# Altium PCB atxmega.PcbDoc
Units mm, origin at the board's own origin, x right, y up, seen from the top; angles counter-clockwise.
Board outline 50 x 40 mm, 2 copper layers (Top Layer, Bottom Layer); 40 components, 48 nets, 226 pads, 47 vias.
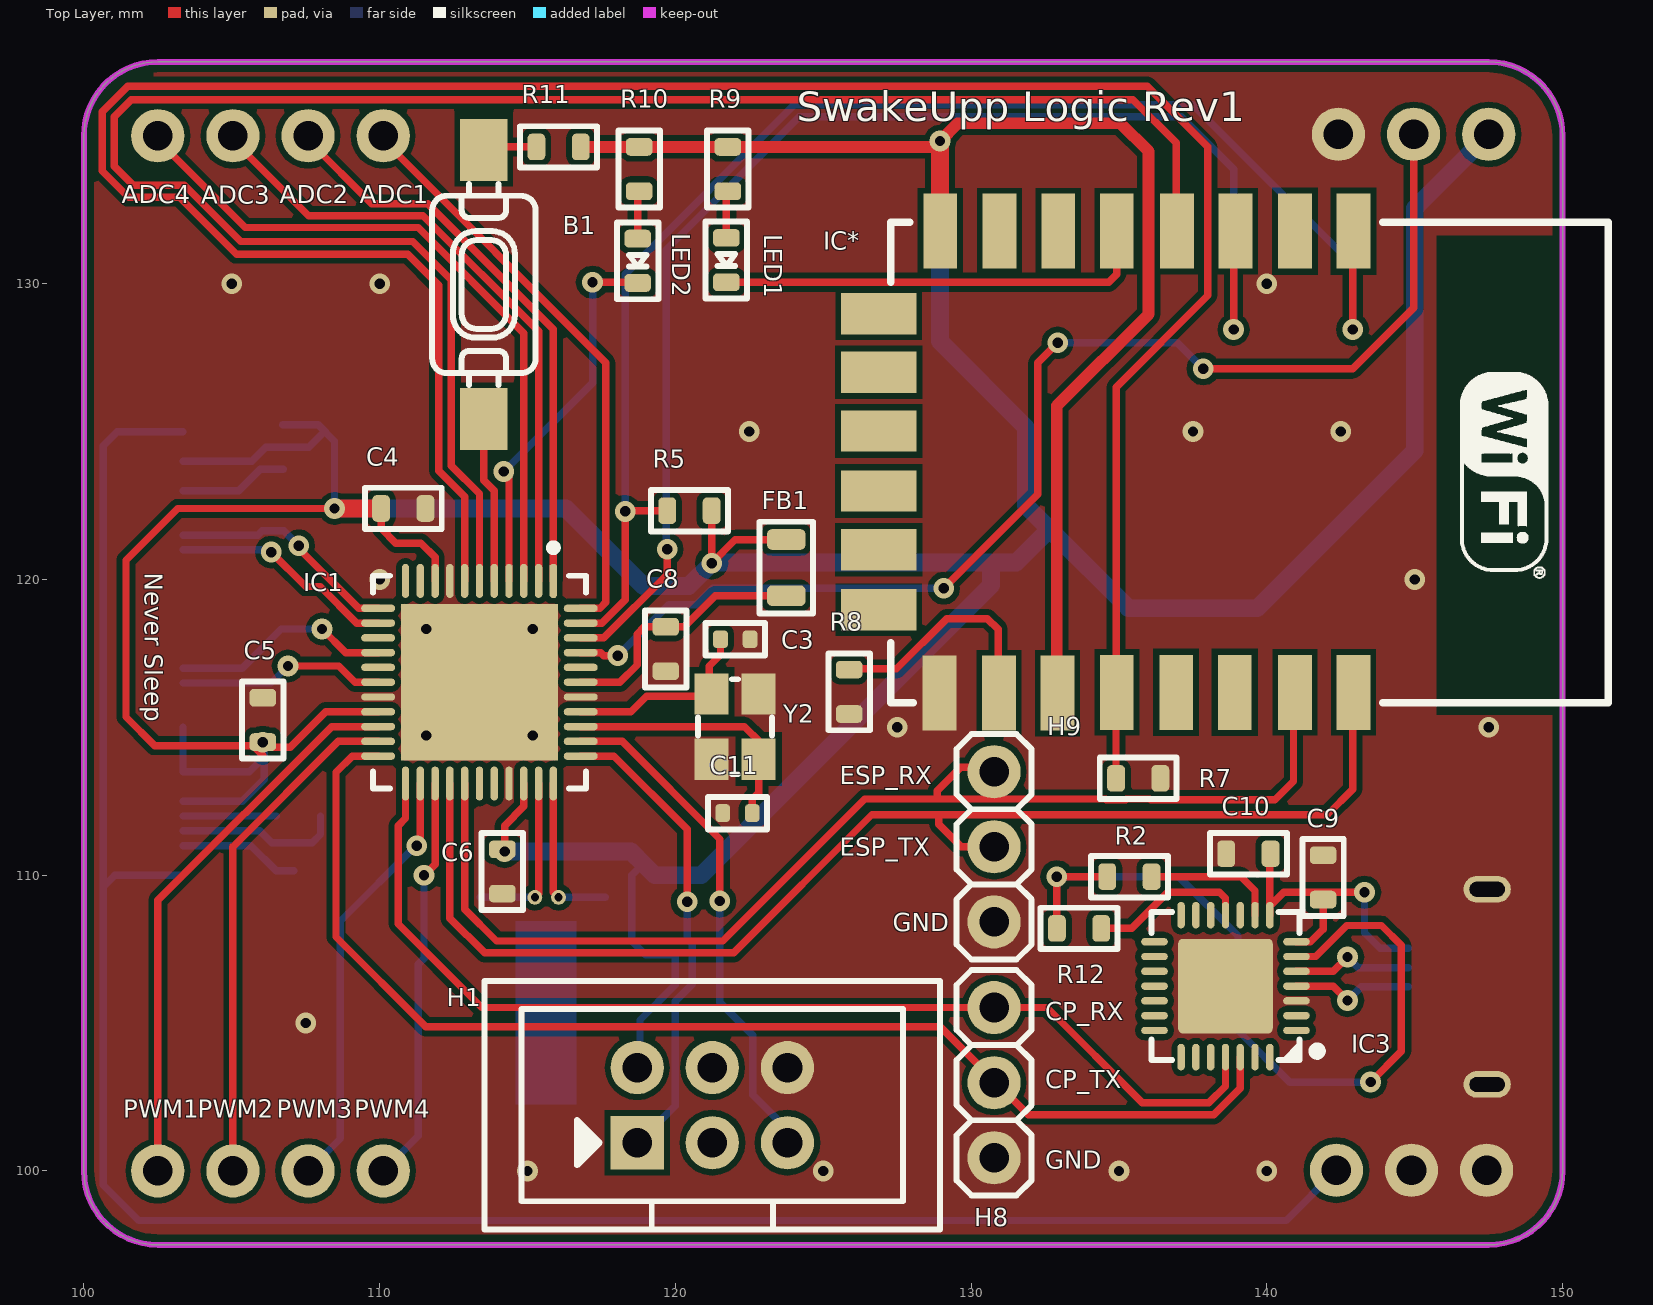
[diagram p0: Top Layer view]
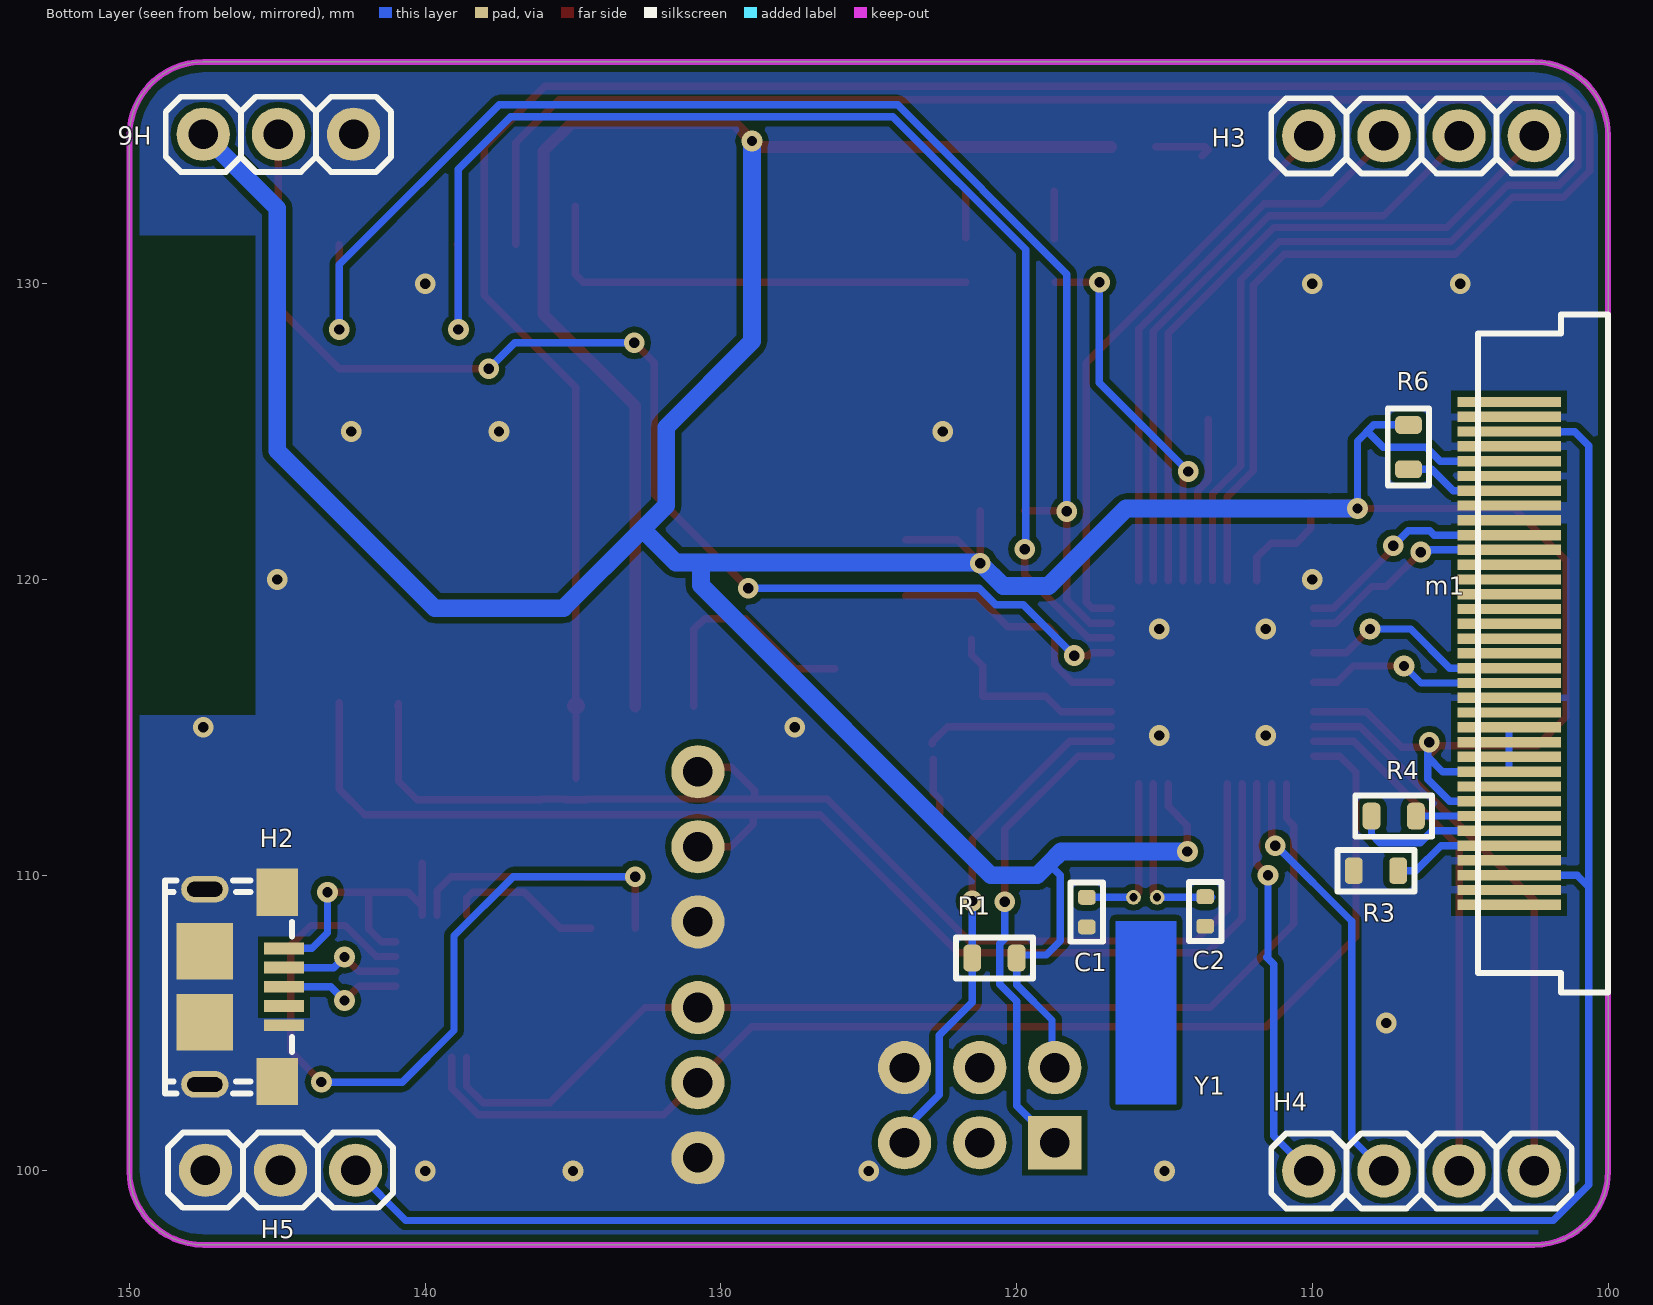
[diagram p1: Bottom Layer view, seen from below]

## Layer stack, top to bottom
Top Solder: solder mask 0.0102, Solder Resist, Dk 3.5
Top Layer: signal copper 0.0356
Dielectric 1: dielectric 0.32, FR-4, Dk 4.8
Bottom Layer: signal copper 0.0356
Bottom Solder: solder mask 0.0102, Solder Resist, Dk 3.5

## Board outline
100,100 100,135 cw(c102.5,135) 102.5,137.5 147.5,137.5 cw(c147.5,135) 150,135 150,100 cw(c147.5,100) 147.5,97.5 102.5,97.5 cw(c102.5,100)

## Design rules (kind name [scope] priority, off if disabled: settings)
Clearance Clearance_1 [OnLayer('Keep-Out Layer') vs InPolygon] p1: gap=0.25
Clearance Clearance_2 [OnLayer('Keep-Out Layer')] p2: gap=0
Clearance Clearance_6 [HasFootprint('FEDUCIAL')] p3: gap=1.1
Clearance [InPolygon] p4: gap=0.2
Clearance Clearance_3 [IsTrack AND AsMM(Width) > 0.2] p5: gap=0.2
Clearance Clearance_4 [All] p6: gap=0.15
ComponentClearance [InComponentClass('Battery_Connection')] p1: gap=0 collisioncheckmode=3 verticalgap=0.1 showdistances=FALSE
ComponentClearance ComponentClearance_1 [All] p2: gap=0.1 collisioncheckmode=3 verticalgap=0.1 showdistances=FALSE
DiffPairsRouting [All] p1: maxlimit=1 minlimit=0.15 mostfreqgap=0.2 toplayer_minwidth=0.15 toplayer_maxwidth=10 toplayer_prefwidth=0.2 bottomlayer_minwidth=0.15 bottomlayer_maxwidth=10 bottomlayer_prefwidth=0.2 maxuncoupledlength=12.7
Height [All] p1: minheight=0 maxheight=1000 prefheight=12.7
HoleSize [All] p1: absolutevalues=TRUE maxlimit=20 minlimit=0.025 maxpercent=80.000 minpercent=20.000
MinimumSolderMaskSliver [All] p1: minsoldermaskwidth=0
PlaneClearance [All] p1: clearance=0.2
PolygonConnect PolygonConnect_3 [All vs IsNamedPolygon('GND_PLANE')] p1: connectstyle=Direct reliefconductorwidth=0.254 reliefentries=4 polygonreliefangle="90 Angle" airgapwidth=0.15
PolygonConnect PolygonConnect_2 [InNamedPolygon('GND_PLANE')] p2: connectstyle=Direct reliefconductorwidth=0.254 reliefentries=4 polygonreliefangle="90 Angle" airgapwidth=0.254
PolygonConnect PolygonConnect_1 [All] p3: connectstyle=Direct reliefconductorwidth=0.254 reliefentries=4 polygonreliefangle="90 Angle" airgapwidth=0.254
RoutingVias [All] p1: holewidth=0.3 width=0.6 viastyle="Through Hole" minholewidth=0.3 minwidth=0.6 maxholewidth=100 maxwidth=100
SilkToSilkClearance [All] p1: silktosilkclearance=0
SilkToSolderMaskClearance [IsPad] p1: minsilkscreentomaskgap=0 clearancetoexposedcopper=TRUE
SolderMaskExpansion [All] p1: expansion=0.102
Width [All] p1: maxlimit=100 minlimit=0.15 preferedwidth=0.2
22 further rules are at their usual default settings.

## Classes and differential pairs
differential pair class USB: D
differential pair D: +D_P -D_N

## Components (designator, comment, footprint, x,y, rotation, side; value= is the part's Value field where it differs from the comment)
B1 "Tactile_Button_2term" TACTILE_MINATUE_SMD_3.5x6mm 113.525,129.975 r90 top
C1 "12pF" C0402 117.625,108.75 r270 bottom
C2 "12pF" C0402 113.625,108.775 r270 bottom
C3 "12pF" C0402 122.025,117.975 r0 top
C4 "100nF" C0603 110.8,122.4 r0 top
C5 "100nF" C0603 106.05,115.25 r90 top
C6 "100nF" C0603 114.15,110.125 r270 top
C8 "100nF" C0603 119.675,117.65 r270 top
C9 "100nF" C0603 141.9,109.925 r270 top
C10 "1uF" C0603 139.375,110.725 r0 top
C11 "12pF" C0402 122.1,112.1 r180 top
FB1 "220R @ 100MHz" L0805 123.75,120.4 r90 top
H1 "Header_PDI" 6-HEADER_BOXED 121.25,102.225 r0 top
H2 "USB_5pin" USB_Micro_B_RECEPTABLE_FCI 148.9,106.225 r270 bottom
H3 "Header_4" Header_MALE_4 110.12,135 r180 bottom
H4 "Header_4" Header_MALE_4 102.5,100 r0 bottom
H5 "Header_3" Header_MALE_3 142.35,100.025 r0 bottom
H6 "Header_3" Header_MALE_3 147.5,135.05 r180 bottom
H8 "Header_3" Header_MALE_3 130.775,105.525 r270 top
H9 "Header_3" Header_MALE_3 130.775,113.5 r270 top
IC1 "ATXMEGA128A4U-MH" 44-VFQFN-E 113.375,116.525 r270 top
IC3 "CP_2102" 28-QFN_Exposed_pad 138.6,106.25 r180 top
IC* "ESP12-E" ESP12-E 132.175,123.4 r270 top
LED1 "LED" 0603_LED 121.725,130.8 r270 top
LED2 "LED" 0603_LED 118.725,130.775 r270 top
m1 "OEL Display Module" FFC-35-pin-0.5 103.35,117.5 r0 bottom
R1 "10k" R0603 120.75,107.2 r0 bottom
R2 "10k" R0603 135.35,109.95 r0 top
R3 "70K" R0603 107.85,110.15 r180 bottom
R4 "10K" R0603 107.25,112 r0 bottom
R5 "10k" R0603 120.475,122.325 r180 top
R6 "10K" R0603 106.75,124.475 r270 bottom
R7 "10k" R0603 135.65,113.275 r0 top
R8 "10k" R0603 125.875,116.2 r270 top
R9 "1k" R0603 121.775,133.875 r270 top
R10 "1k" R0603 118.775,133.875 r270 top
R11 "10k" R0603 116.05,134.625 r180 top
R12 "10k" R0603 133.65,108.2 r180 top
Y1 "32.768" crystal_6.2x2.1x2.1 115.25,109.25 r90 bottom
Y2 "Crystal_Ground" Crystal_3.2x2.5 122.014,115.025 r90 top

## Footprints (in the part's own frame and the unit in brackets; to place one, negate y for a bottom-side part, rotate by r counter-clockwise, add the part's x,y. Pads: shape width x height; smd on the part's side, far side on the other; paste and mask are expansions set on the pad)
6-HEADER_BOXED [mm]
  rect 1.8x1.8 hole 1: 1(-2.54,-1.27)
  round 1.8 hole 1: 2(-2.54,1.27) 3(0,-1.27) 4(0,1.27) 5(2.54,-1.27) 6(2.54,1.27)
  silkscreen extent -7.7,-4.2 7.7,4.2, body extent -7.7,-4.2 7.7,4.2, height 9.3
28-QFN_Exposed_pad [mm] "QFN, 28-Leads, Body 5,00x5,00mm, Pitch 0,50mm"
  oval 0.9x0.25 smd: 1(-2.4,1.5) 2(-2.4,1) 3(-2.4,0.5) 4(-2.4,0) 5(-2.4,-0.5) 6(-2.4,-1) 7(-2.4,-1.5) 15(2.4,-1.5) 16(2.4,-1) 17(2.4,-0.5) 18(2.4,0) 19(2.4,0.5) 20(2.4,1) 21(2.4,1.5)
  oval 0.25x0.9 smd: 8(-1.5,-2.4) 9(-1,-2.4) 10(-0.5,-2.4) 11(0,-2.4) 12(0.5,-2.4) 13(1,-2.4) 14(1.5,-2.4) 22(1.5,2.4) 23(1,2.4) 24(0.5,2.4) 25(0,2.4) 26(-0.5,2.4) 27(-1,2.4) 28(-1.5,2.4)
  rrect10% 3.2x3.2 smd paste-20: PAD(0,0)
  silkscreen extent -3.24,-2.5 2.5,2.5, body extent -2.52,-2.52 2.52,2.52, height 0.91
44-VFQFN-E [mm] "44-VFQFN Exposed Pad  7x7"
  oct 1.15x0.25 smd: 1(-3.425,2.5)
  oval 1.15x0.25 smd: 2(-3.425,2) 3(-3.425,1.5) 4(-3.425,1) 5(-3.425,0.5) 6(-3.425,0) 7(-3.425,-0.5) 8(-3.425,-1) 9(-3.425,-1.5) 10(-3.425,-2) 11(-3.425,-2.5) 23(3.425,-2.5) 24(3.425,-2) 25(3.425,-1.5) 26(3.425,-1) 27(3.425,-0.5) 28(3.425,0) 29(3.425,0.5) 30(3.425,1) 31(3.425,1.5) 32(3.425,2) 33(3.425,2.5)
  oval 0.25x1.15 smd: 12(-2.5,-3.425) 13(-2,-3.425) 14(-1.5,-3.425) 15(-1,-3.425) 16(-0.5,-3.425) 17(0,-3.425) 18(0.5,-3.425) 19(1,-3.425) 20(1.5,-3.425) 21(2,-3.425) 22(2.5,-3.425) 34(2.5,3.425) 35(2,3.425) 36(1.5,3.425) 37(1,3.425) 38(0.5,3.425) 39(0,3.425) 40(-0.5,3.425) 41(-1,3.425) 42(-1.5,3.425) 43(-2,3.425) 44(-2.5,3.425)
  rect 5.3x5.3 smd: 45(0,0)
  silkscreen extent -4.67,-3.6 3.6,3.6, body extent -3.57,-3.57 3.57,3.57, height 1
0603_LED [mm]
  rrect50% 0.6x0.9 smd: A(-0.75,0) C(0.75,0)
  silkscreen extent -1.3,-0.7 1.3,0.7, body extent -0.81,-0.4 0.81,0.4, height 0.6
C0402 [mm]
  rrect50% 0.5x0.6 smd: 1(-0.5,0) 2(0.5,0)
  silkscreen extent -1,-0.55 1,0.55, body extent -0.51,-0.26 0.51,0.26, height 0.51
C0603 [mm]
  rrect50% 0.6x0.9 smd: 1(-0.75,0) 2(0.75,0)
  silkscreen extent -1.3,-0.7 1.3,0.7, body extent -0.86,-0.41 0.86,0.41, height 0.81
Crystal_3.2x2.5 [mm]
  rect 1.4x1.15 smd: 1(-1.1,-0.8) 2(-1.1,0.8) 2(1.1,-0.8) 3(1.1,0.8)
  silkscreen extent -1.6,-1.25 1.6,1.25, body extent -1.6,-1.25 1.6,1.25, height 0.6
crystal_6.2x2.1x2.1 [mm] "lying cylinder"
  round 0.5 hole 0.28: 0(0,0) 1(0,0.8)
  Top Layer region: -7,1.4 -0.8,1.4 -0.8,-0.65 -7,-0.65
  body extent -7.03,-0.7 -0.83,1.4, height 2.09
ESP12-E [mil] "WIFI module"
  rect 100x45 smd: 1(-329.79,423.34) 2(-329.79,345.34) 3(-329.79,266.34) 4(-329.79,188.34) 5(-329.79,108.34) 6(-329.79,30.34) 7(-329.79,-47.66) 8(-329.79,-126.66) 15(285.21,-127.66) 16(285.21,-48.66) 17(285.21,29.34) 18(284.21,108.34) 19(284.21,187.34) 20(284.21,265.34) 21(284.21,345.34) 22(284.21,423.34)
  rect 55x100 smd: 9(-219.79,-208.66) 10(-141.79,-208.66) 11(-63.79,-208.66) 12(16.21,-208.66) 13(94.21,-208.66) 14(174.21,-208.66)
  silkscreen extent -342,-193 298,762, body extent -339,-185 291,760
FFC-35-pin-0.5 [mm] "Flat Flexible Connector 35 positions pitch 0.5mm"
  rect 3.5x0.35 smd: 1(0,8.5) 2(0,8) 3(0,7.5) 4(0,7) 5(0,6.5) 6(0,6) 7(0,5.5) 8(0,5) 9(0,4.5) 10(0,4) 11(0,3.5) 12(0,3) 13(0,2.5) 14(0,2) 15(0,1.5) 16(0,1) 17(0,0.5) 18(0,0) 19(0,-0.5) 20(0,-1) 21(0,-1.5) 22(0,-2) 23(0,-2.5) 24(0,-3) 25(0,-3.5) 26(0,-4) 27(0,-4.5) 28(0,-5) 29(0,-5.5) 30(0,-6) 31(0,-6.5) 32(0,-7) 33(0,-7.5) 34(0,-8) 35(0,-8.5)
  silkscreen extent -3.35,-11.47 1.05,11.47, body extent -3.35,-11.48 1.05,11.42, height 2
Header_MALE_3 [mm]
  round 1.8 hole 1: 1(0,0) 2(2.54,0) 3(5.08,0)
  silkscreen extent -1.27,-1.27 6.35,1.27, body extent -1.27,-1.27 6.35,1.27, height 8.34
Header_MALE_4 [mm]
  round 1.8 hole 1: 1(0,0) 2(2.54,0) 3(5.08,0) 4(7.62,0)
  silkscreen extent -1.27,-1.27 8.89,1.27, body extent -1.27,-1.27 8.89,1.27, height 8.34
L0805 [mm]
  rrect50% 0.7x1.3 smd: 1(-0.95,0) 2(0.95,0)
  silkscreen extent -1.55,-0.9 1.55,0.9, body extent -1.01,-0.61 1.01,0.61, height 0.81
R0603 [mm]
  rrect50% 0.6x0.9 smd: 1(-0.75,0) 2(0.75,0)
  silkscreen extent -1.3,-0.7 1.3,0.7, body extent -0.86,-0.41 0.86,0.41, height 0.51
TACTILE_MINATUE_SMD_3.5x6mm [mm] "TE CONNECTIVITY FSM"
  rect 2.1x1.6 smd: 1(-4.55,0) 2(4.55,0)
  silkscreen extent -3.4,-1.75 3.4,1.75, body extent -5,-1.75 5,1.75, height 4.3
USB_Micro_B_RECEPTABLE_FCI [mm] "Micro USB header, surface mount with slots right angle"
  rect 0.4x1.35 smd: 1(-1.3,4.125) 2(-0.65,4.125) 3(0,4.125) 4(0.65,4.125) 5(1.3,4.125)
  oval 0.9x1.6 hole 0.5 slot 1.2 at 90 deg paste+0: SHIELD(-3.3,1.45)
  rect 1.6x1.4 smd: SHIELD(-3.2,3.9) SHIELD(3.2,3.9)
  rect 1.9x1.9 smd: SHIELD(-1.2,1.45) SHIELD(1.2,1.45)
  oval 0.9x1.6 hole 0.5 slot 1.2 at 90 deg paste+1: SHIELD(3.3,1.45)
  silkscreen extent -3.6,0.1 3.6,4.4, body extent -3.99,-0.8 3.99,4.63, height 2.71

## Part data
C1 C2 C3 C4 C5 C6 C8 C9 C10 C11: library part Capacitor, "Schematic symbol of a capacitor"
FB1: library part Ferrite
H1: "6-pin Boxed header with pinout used for PDI programming by Atmel programmers"
H2: "5 Pins USB Connector"
H3 H4: "Generic 4pin header symbol"
H5 H6 H8 H9: "Generic 3pin header symbol"
IC1: "AVR AVR® XMEGA® A4U Microcontroller IC 8/16-Bit 32MHz 128KB (64K x 16) FLASH 44-VQFN (7x7)"
IC3: "Single chip USB to UART Bridge"
LED1 LED2: "Schematic symbol of a LED"
m1: "Part ID: UG-6028GDEAF01"
R1 R2 R3 R4 R5 R6 R7 R8 R9 R10 R11 R12: library part Resistor, "Schematic symbol of a resistor"
Y1: library part "Abracon LLC AB26T-32.768KHZ", "32.768kHz ±20ppm Crystal 12.5pF 35 kOhm -10°C ~ 60°C Through Hole Cylindrical Can, Radial"
Y2: "Schematic symbol of a 2pin crystal with case connection"

## Via types
v1: diameter 0.7, hole 0.35, Top Layer to Bottom Layer, 47 vias

## Nets (pads, with @x,y where several pads share a name; then routed paths per layer and width w, separated by ;. In a path a pad name is that pad's centre, name@x,y a point inside that pad or via, vN(x,y) a via of type N, cw(c..) or ccw(c..) an arc to the next point about the centre after c; other vN are vias at no path point)
3V3: C4.1 C5.1 C6.1 FB1.2 H1.2 H6.1 IC1.9 IC1.19 IC1.31 IC*.8 IC*.17 m1.8 m1.10 m1.11 m1.12 m1.13 m1.31 R1.1 R5.1 R6.1 R9.1 R10.1 R11.1 | length 193.7
  Top Layer w0.25: 106.05,114.05 105.719,114.381 102.394,114.381 101.425,115.35 101.425,120.65 103.175,122.4 v1(108.475,122.4) ; C5.1@106.3,114.325 106.975,114.325 108.175,115.525 IC1.19 ; C4.1 110.05,121.725 110.55,121.225 111.4,121.225 111.875,120.75 IC1.9 ; v1(114.225,110.8) 114.225,111.675 114.875,112.325 IC1.31
  Top Layer w0.254: R5.1 v1(121.225,120.55) 122.025,121.35 FB1.2
  Top Layer w0.4: R11.1 128.75,134.625 v1(128.95,134.825) 129.55,135.425 135.05,135.425 136,134.475 136,128.975 132.895,125.87 IC*.17@132.895,115.706
  Top Layer w0.6: v1(108.475,122.4) 108.5,122.4 C4.1 ; IC*.8@128.95,132.627 v1(128.95,134.825)
  Bottom Layer w0.25: m1.8 105.35,112.5 106.1,113.25 106.1,114 ; m1.13 m1.12 m1.11 m1.10 105.6,113.5 106.1,114 ; m1.31 105.675,124 106.15,124.475 107.6,124.475 108.125,125 ; v1(106.05,114.5) 106.1,114.45 106.1,114 ; R6.1@106.725,125.225 R6.1 107.925,125.225 108.475,124.675 v1(108.475,122.4) ; 118.913,110.388 118.525,110 118.525,107.775 119,107.3 120,107.3 120,106.3 118.804,105.104 118.804,103.851 H1.2@119.135,103.52
  Bottom Layer w0.6: v1(108.475,122.4) 109.35,122.4 ; 109.475,122.4 116.3,122.4 118.925,119.775 120.45,119.775 v1(121.225,120.55) 121.25,120.575 131.525,120.575 132.65,121.7 ; v1(114.225,110.8) 118.5,110.8 118.913,110.388 119.3,110 120.875,110 130.675,119.8 130.675,120.55 ; v1(128.95,134.825) 128.95,128.05 131.85,125.15 131.85,122.5 132.238,122.112 132.65,121.7 ; H6.1 145,132.55 145,124.35 139.675,119.025 135.325,119.025 132.65,121.7
13V: H5.1 m1.3 m1.33 | length 73.7
  Bottom Layer w0.25: m1.3 101.05,110 100.65,109.6 ; m1.33 101.125,125 100.65,124.525 100.65,109.6 ; H5.1 140.65,98.325 101.85,98.325 100.65,99.525 100.65,109.6
!PWR_SAVE: H6.2 IC1.41 | length 42.3
  Top Layer w0.254: IC1.41 117.475,117.525 117.573,117.427 118.048,117.427 v1(118.05,117.425) ; v1(129.075,119.7) 132.25,122.875 132.25,127.325 v1(132.925,128) ; v1(137.85,127.125) 142.9,127.125 144.96,129.185 H6.2
  Bottom Layer w0.254: v1(118.05,117.425) 119.773,119.148 120.71,119.148 121.262,119.7 v1(129.075,119.7) ; v1(132.925,128) 136.975,128 v1(137.85,127.125)
AVCC: C8.1 FB1.1 IC1.39 | length 8.8
  Top Layer w0.25: IC1.39 118.125,116.525 118.706,117.106 118.706,118.156 118.95,118.4 C8.1 120.3,118.4 121.35,119.45 FB1.1
BUT_1: B1.1 IC1.5 | length 5.6
  Top Layer w0.25: B1.1 113.525,123.35 113.875,123 IC1.5
CP_RX: H8.1 IC1.23 IC3.25 | length 36.6
  Top Layer w0.25: IC1.23 110.875,111.925 110.625,111.675 110.625,108.35 113.45,105.525 132.566,105.525 135.791,102.3 138.034,102.3 138.6,102.866 IC3.25
CP_TX: H8.2 IC1.22 IC3.26 | length 41.7
  Top Layer w0.25: IC1.22 109.075,114.025 108.525,113.475 108.525,107.91 111.56,104.875 128.96,104.875 131.935,101.9 138.2,101.9 139.1,102.8 IC3.26
D_N: H2.2 IC3.5 | length 4.1
  Top Layer w0.25: IC3.5 142.24,106.75 v1(142.725,107.235)
  Bottom Layer w0.25: v1(142.725,107.235) 143.085,106.875 H2.2
D_P: H2.3 IC3.4 | length 4.2
  Top Layer w0.25: IC3.4 142.24,106.25 v1(142.725,105.765)
  Bottom Layer w0.25: v1(142.725,105.765) 143.185,106.225 H2.3
ESP_EN: IC1.42 IC*.3 | length 45.2
  Top Layer w0.25: IC1.42 117.581,118.025 119.725,120.169 v1(119.725,121.025) 119.725,121 v1@119.575,120.85 ; v1(138.875,128.45) 138.875,131.287 IC*.3@138.915,131.327
  Bottom Layer w0.25: v1(119.725,121.025) 119.685,120.985 119.685,131.144 124.191,135.65 137.1,135.65 138.875,133.875 v1(138.875,128.45)
ESP_FP: IC1.7 IC*.18 R7.1 | length 86.6
  Top Layer w0.25: IC1.7 112.875,122.798 112,123.673 112,129.949 110.949,131 105.159,131 103.234,132.925 101.509,132.925 100.625,133.809 100.625,135.816 101.484,136.675 135.95,136.675 138,134.625 138,129.6 134.902,126.502 IC*.18@134.902,115.731 ; R7.1 IC*.18@134.9,115.729
  Top Layer w0.6: IC*.18@134.9,115.729 IC*.18@134.902,115.731
ESP_RST: IC1.43 IC*.1 R5.2 | length 48.2
  Top Layer w0.25: IC1.43 117.516,118.525 118.3,119.309 v1(118.3,122.3) ; 118.655,122.325 R5.2 ; v1(142.9,128.45) 142.903,128.453 IC*.1@142.903,131.327
  Bottom Layer w0.25: v1(118.3,122.3) 118.3,130.325 124.025,136.05 137.5,136.05 142.9,130.65 v1(142.9,128.45)
ESP_RX: H9.1 IC1.27 IC*.21 | length 40.2
  Top Layer w0.25: IC1.27 112.875,108.85 113.95,107.775 121.6,107.775 126.4,112.575 128.85,112.575 ; H9.1@130.775,113.65 129.65,113.65 128.85,112.85 128.85,112.575 ; IC*.21@140.9,115.709 IC*.21@140.922,115.731 ; IC*.21@140.9,115.809 140.9,113.175 140.275,112.55 136.074,112.55 136.049,112.575 135.251,112.575 135.226,112.55 134.574,112.55 134.549,112.575 128.85,112.575
ESP_SLP: IC1.6 IC*.4 | length 65.4
  Top Layer w0.25: IC1.6 113.375,122.899 112.425,123.849 112.425,130.125 111.125,131.425 105.3,131.425 103.4,133.325 101.675,133.325 101.025,133.975 101.025,135.65 101.6,136.225 135.475,136.225 136.934,134.766 IC*.4@136.934,131.327
ESP_TX: H9.2 IC1.26 IC*.22 | length 43.3
  Top Layer w0.25: IC1.26 112.375,108.55 113.55,107.375 121.975,107.375 126.65,112.05 128.9,112.05 ; H9.2 129.666,110.96 128.9,111.726 128.9,112.05 ; IC*.22@142.903,115.831 142.903,112.903 142.05,112.05 128.9,112.05
GND: C1.2 C2.2 C3.2 C4.2 C5.2 C6.2 C8.2 C9.1 C10.1 C11.2 H1.6 H2.5 H2.SHIELD H5.2 H5.3 H6.3 H8.3 H9.3 IC1.8 IC1.18 IC1.30 IC1.38 IC1.45 IC3.3 IC3.PAD IC*.15 m1.2 m1.4 m1.15 m1.27 m1.28 m1.30 m1.32 m1.34 R3.1 R7.2 R8.2 Y2.2
  other v1: 115,100 125,100 135,100 140,100 107.5,105 111.575,114.725 115.175,114.725 127.5,115 147.5,115 111.575,118.325 115.175,118.325 110,120 145,120 122.5,125 137.5,125 142.5,125 105,130 110,130 140,130
LED_1: IC*.5 LED1.C | length 15.6
  Top Layer w0.254: LED1.C 134.65,130.05 134.927,130.327 IC*.5@134.927,132.627
LED_2: IC1.4 LED2.C | length 12.9
  Top Layer w0.25: v1(114.2,123.65) 114.375,123.475 IC1.4 ; v1(117.2,130.05) LED2.C@118.7,130.05
  Bottom Layer w0.25: v1(114.2,123.65) 117.2,126.65 v1(117.2,130.05)
NetB1_2: B1.2 R11.2 | length 2
  Top Layer w0.25: B1.2 B1.2@113.725,134.325 ; B1.2@113.625,134.625 R11.2
NetH1_1: H1.1 IC1.34 | length 15.9
  Top Layer w0.25: IC1.34 117.925,114.025 120.4,111.55 v1(120.4,109.1)
  Bottom Layer w0.25: H1.1@119.135,100.98 119.135,101.335 120,102.2 120,105.734 120.575,106.309 120.575,107.676 120.4,107.851 v1(120.4,109.1)
NetH1_5: H1.5 IC1.35 R1.2 | length 17.4
  Top Layer w0.25: IC1.35 118.2,114.525 121.5,111.225 v1(121.5,109.125)
  Bottom Layer w0.25: v1(121.5,109.125) 121.5,105.7 122.615,104.585 122.615,102.58 H1.5@124.215,100.98
NetH3_1: H3.1 IC1.44 | length 19.6
  Top Layer w0.25: H3.1@110.15,134.825 117.65,127.325 117.65,119.225 117.45,119.025 IC1.44
NetH3_2: H3.2 IC1.1 | length 19.4
  Top Layer w0.25: H3.2@107.61,134.825 109.735,132.7 111.631,132.7 115.875,128.456 IC1.1
NetH3_3: H3.3 IC1.2 | length 21.4
  Top Layer w0.25: H3.3@105.07,134.825 107.595,132.3 111.466,132.3 115.375,128.391 IC1.2
NetH3_4: H3.4 IC1.3 | length 23.4
  Top Layer w0.25: H3.4@102.53,134.825 105.455,131.9 111.3,131.9 114.875,128.325 IC1.3
NetH4_1: H4.1 IC1.20 | length 19
  Top Layer w0.25: H4.1 102.5,109.15 108.375,115.025 IC1.20
NetH4_2: H4.2 IC1.21 | length 17.3
  Top Layer w0.25: H4.2 105.04,110.965 108.6,114.525 IC1.21
NetH4_3: H4.3 IC1.24 | length 14.7
  Top Layer w0.25: v1(111.25,111) 111.375,111.125 IC1.24
  Bottom Layer w0.25: H4.3 108.675,101.095 108.675,108.45 111.225,111 v1(111.25,111)
NetH4_4: H4.4 IC1.25 | length 14
  Top Layer w0.25: v1@111.544,109.881 111.5,109.925 v1(111.5,110) 111.875,110.375 IC1.25
  Bottom Layer w0.25: H4.4 111.3,101.18 111.3,106.987 111.544,107.23 111.5,107.274 v1(111.5,110)
NetIC3_6: IC3.6 R2.1 R12.2 | length 28.1
  Top Layer w0.25: R12.2 v1(132.9,109.95) R2.1 ; IC3.6 141.656,107.25 142.706,108.3 143.875,108.3 144.55,107.625 144.55,104.048 v1(143.507,103.005)
  Bottom Layer w0.25: v1(132.9,109.95) 137.025,109.95 139.025,107.95 139.025,104.75 140.775,103 143.502,103 v1(143.507,103.005)
NetIC3_9: IC3.9 R2.2 | length 4.5
  Top Layer w0.25: R2.2 139.125,109.95 139.6,109.475 IC3.9
NetIC3_11: IC3.11 R12.1 | length 5.4
  Top Layer w0.25: R12.1 135.425,108.2 136.65,109.425 138.4,109.425 138.6,109.225 IC3.11
NetIC*_16: IC*.16 R8.1 | length 8.2
  Top Layer w0.25: R8.1@126.15,116.975 127.475,116.975 129.175,118.675 130.55,118.675 130.914,118.311 IC*.16@130.914,115.706
NetLED1_A: LED1.A R9.2 | length 1.6
  Top Layer w0.25: LED1.A R9.2@121.725,133.125
NetLED2_A: LED2.A R10.2 | length 1.6
  Top Layer w0.25: LED2.A R10.2@118.725,133.125
Netm1_5: m1.5 R3.2 | length 4.1
  Bottom Layer w0.25: m1.5 105.65,111 106.5,110.15 R3.2
Netm1_6: m1.6 R4.2 | length 5.6
  Bottom Layer w0.25: m1.6 105.949,111.5 106.349,111.1 107.725,111.1 108,111.375 R4.2
Netm1_7: m1.7 R4.1 | length 3.2
  Bottom Layer w0.25: m1.7 R4.1
Netm1_29: m1.29 R6.2 | length 3.7
  Bottom Layer w0.25: m1.29 105.241,123 105.966,123.725 R6.2
OSC1: C2.1 IC1.32 Y1.0 | length 5.8
  Top Layer w0.25: Y1.0 115.375,109.375 IC1.32
  Bottom Layer w0.25: C2.1@113.4,109.25 Y1.0
OSC2: C1.1 IC1.33 Y1.1 | length 5.5
  Top Layer w0.25: IC1.33 115.875,109.425 Y1.1
  Bottom Layer w0.25: Y1.1 C1.1
SCRN_CSB: IC1.12 m1.26 | length 7.8
  Top Layer w0.25: v1(107.269,121.14) 107.269,121.047 109.291,119.025 IC1.12
  Bottom Layer w0.25: m1.26 105.875,121.5 106.025,121.65 106.758,121.65 v1(107.269,121.14)
SCRN_RS: IC1.13 m1.25 | length 7.7
  Top Layer w0.25: v1(106.334,120.925) 107.499,119.76 107.99,119.76 109.225,118.525 IC1.13
  Bottom Layer w0.25: m1.25 106,121 106.175,120.825 106.275,120.925 v1(106.334,120.925)
SCRN_SCL: IC1.17 m1.16 | length 7.1
  Top Layer w0.25: v1(106.9,117.075) 108.619,117.075 109.169,116.525 IC1.17
  Bottom Layer w0.25: m1.16 106.325,116.5 v1(106.9,117.075)
SCRN_SDI: IC1.15 m1.17 | length 7.5
  Top Layer w0.25: v1(108.05,118.325) 108.85,117.525 IC1.15
  Bottom Layer w0.25: m1.17 105.35,117 106.675,118.325 v1(108.05,118.325)
VBUS: C9.2 C10.2 H2.1 IC3.7 IC3.8 | length 10.6
  Top Layer w0.25: IC3.8 IC3.8@140.1,108.95 ; C10.2@140.1,110.4 IC3.8@140.1,108.95 ; IC3.7 141.475,107.75 141.9,108.175 C9.2@141.9,109.425 ; v1@143.35,109.475 v1(143.3,109.425) C9.2@141.9,109.425 ; IC3.8@140.1,108.95 140.575,109.425 C9.2@141.9,109.425
  Bottom Layer w0.25: v1(143.3,109.425) 143.3,108.05 143.825,107.525 H2.1
XTAL1: C11.1 IC1.36 Y2.1 | length 8.2
  Top Layer w0.25: IC1.36 122.339,115.025 122.85,114.514 Y2.1@122.85,114.45 ; C11.1 122.6,112.575 122.814,112.789 Y2.1
XTAL2: C3.1 IC1.37 Y2.3 | length 6.6
  Top Layer w0.25: IC1.37 118.5,115.525 119.025,116.05 121.139,116.05 121.139,117.064 121.525,117.45 C3.1
pads on no net: H1.3 H1.4 H2.4 IC1.10 IC1.11 IC1.14 IC1.16 IC1.28 IC1.29 IC1.40 IC3.1 IC3.2 IC3.10 IC3.12 IC3.13 IC3.14 IC3.15 IC3.16 IC3.17 IC3.18 IC3.19 IC3.20 IC3.21 IC3.22 IC3.23 IC3.24 IC3.27 IC3.28 IC*.2 IC*.6 IC*.7 IC*.9 IC*.10 IC*.11 IC*.12 IC*.13 IC*.14 IC*.19 IC*.20 m1.1 m1.9 m1.14 m1.18 m1.19 m1.20 m1.21 m1.22 m1.23 m1.24 m1.35

## Polygon pours and split planes (outlines as drawn)
GND on Top Layer "GND_L01_P004" (solid, pour order 4): 100,100 100,135 cw(c102.5,135) 102.5,137.5 147.5,137.5 cw(c147.5,135) 150,135 150,100 cw(c147.5,100) 147.5,97.5 102.5,97.5 cw(c102.5,100)
GND on Bottom Layer "GND_L02_P005" (solid, pour order 5): 100,100 100,135 cw(c102.5,135) 102.5,137.5 147.5,137.5 cw(c147.5,135) 150,135 150,100 cw(c147.5,100) 147.5,97.5 102.5,97.5 cw(c102.5,100)

## Keep-outs
Keep-Out Layer:
  the board outline again, w0.2

## Other copper
Multi-Layer:
  pour cut-out: 150,115.4 145.725,115.4 145.725,131.631 150,131.631

## Silkscreen, mask and mechanical layers (free items; w line width, h text height)
Top Overlay:
  text "SwakeUpp Logic Rev1" at 124.1,135.5 h1
  text "ADC4" at 101.275,132.725 h0.6
  text "ADC2" at 106.625,132.725 h0.6
  text "ADC1" at 109.325,132.725 h0.6
  text "ADC3" at 103.975,132.7 h0.6
  text "Never Sleep" at 102.05,120.225 h0.6 r270
  text "ESP_RX" at 125.55,113.075 h0.6
  text "ESP_TX" at 125.55,110.65 h0.6
  text "GND" at 127.349,108.1 h0.6
  text "CP_RX" at 132.5,105.1 h0.6
  text "CP_TX" at 132.5,102.8 h0.6
  text "PWM1" at 101.325,101.8 h0.6
  text "PWM2" at 103.85,101.8 h0.6
  text "PWM3" at 106.525,101.8 h0.6
  text "PWM4" at 109.15,101.8 h0.6
  text "GND" at 132.5,100.075 h0.6
Mechanical 1:
  lines w0: 100,135 cw(c102.5,135) 102.5,137.5
  lines w0.2: 100,100 ccw(c102.5,100) 102.5,97.5 147.5,97.5 ccw(c147.5,100) 150,100 150,135 ccw(c147.5,135) 147.5,137.5 102.5,137.5 ccw(c102.5,135) 100,135 100,100

## Text inside footprints (layer, text, board x,y; h text height)
IC*: Mechanical 13 "CUTOUT POLYGON" at 150.41,131.776 h0.25 r270; Mechanical 13 "ANTENNA AREA" at 150.918,131.776 h0.25 r270